# Altium PCB Test.PcbDoc (part 7 of 9)
Units mm, origin at the board's own origin, x right, y up, seen from the top; angles counter-clockwise.
Board outline 152.4 x 101.6 mm, 2 copper layers (Top Layer, Bottom Layer); 1 components, 0 nets, 1713 pads, 1 vias.
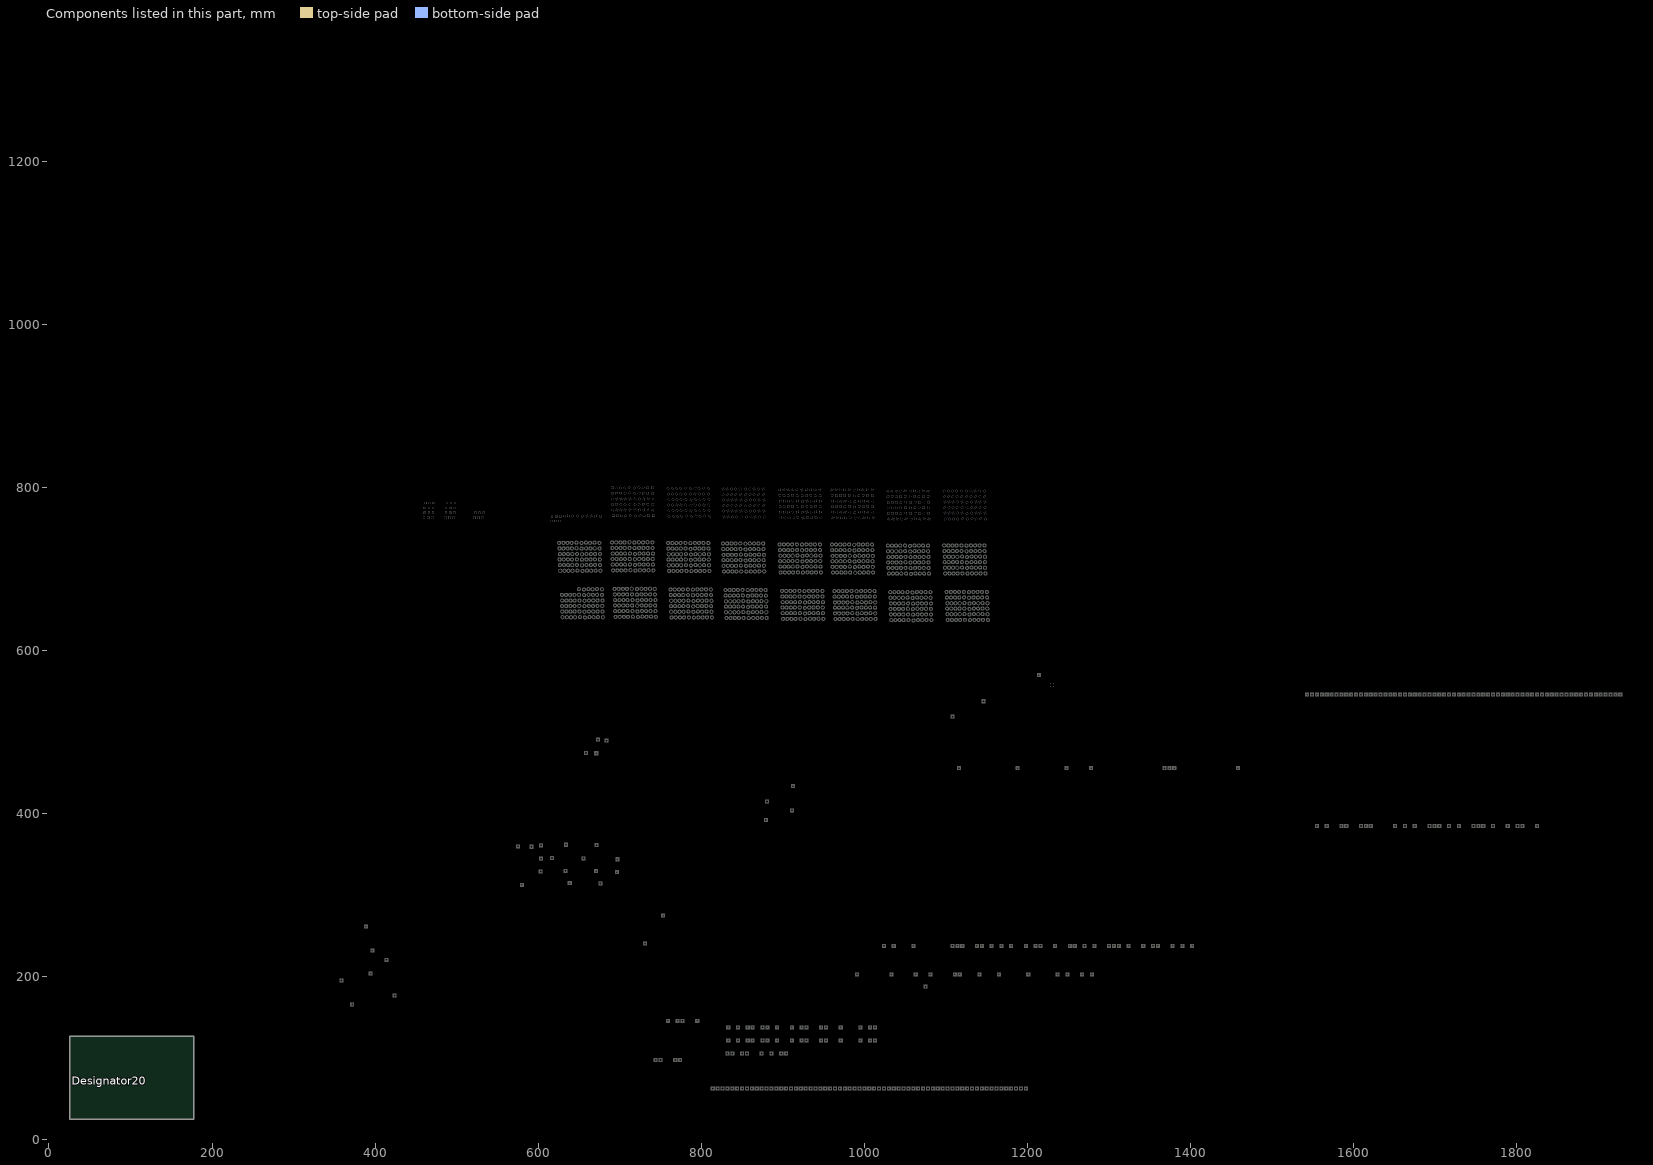
[diagram p7: the components of this part, seen from the top]

## Via types
v1: diameter 0.9, hole 0.4, Top Layer to Bottom Layer, 1 vias

## Nets (pads, with @x,y where several pads share a name; then routed paths per layer and width w, separated by ;. In a path a pad name is that pad's centre, name@x,y a point inside that pad or via, vN(x,y) a via of type N, cw(c..) or ccw(c..) an arc to the next point about the centre after c; other vN are vias at no path point) (continued)
copper on no net: (continued)
  Top Layer w0.25: 1087.002,1184.065 ccw(c1087.238,1182.817) 1087.473,1181.57 1088.908,1181.841 ccw(c1088.672,1183.089) 1088.437,1184.336 1088.967,1184.065 ; 1087.002,1197.527 ccw(c1087.238,1196.279) 1087.473,1195.032 1088.908,1195.303 ccw(c1088.672,1196.551) 1088.437,1197.798 1088.967,1197.527 ; 1087.51,1177.08 ccw(c1087.746,1175.832) 1087.981,1174.585 1089.416,1174.856 ccw(c1089.18,1176.104) 1088.945,1177.351 1089.475,1177.08 ; 1087.789,1335.27 1088.261,1332.774 1090.757,1333.246 1090.285,1335.742 ; 1088.043,1328.412 1088.515,1325.916 1091.011,1326.388 1090.539,1328.884 ; 1088.297,1314.823 1088.769,1312.327 1091.265,1312.799 1090.793,1315.295 ; 1088.32,1268.37 ccw(c1088.556,1267.122) 1088.791,1265.875 1090.226,1266.146 ccw(c1089.99,1267.394) 1089.755,1268.641 1090.285,1268.37 ; 1088.551,1307.965 1089.023,1305.469 1091.519,1305.941 1091.047,1308.437 ; 1088.551,1321.427 1089.023,1318.931 1091.519,1319.403 1091.047,1321.899 ; 1088.574,1261.512 ccw(c1088.81,1260.264) 1089.045,1259.017 1090.48,1259.288 ccw(c1090.244,1260.536) 1090.009,1261.783 1090.539,1261.512 ; 1088.828,1247.923 ccw(c1089.064,1246.675) 1089.299,1245.428 1090.734,1245.699 ccw(c1090.498,1246.947) 1090.263,1248.194 1090.793,1247.923 ; 1089.059,1300.98 1089.531,1298.484 1092.027,1298.956 1091.555,1301.452 ; 1089.082,1241.065 ccw(c1089.318,1239.817) 1089.553,1238.57 1090.988,1238.841 ccw(c1090.752,1240.089) 1090.517,1241.336 1091.047,1241.065 ; 1089.082,1254.527 ccw(c1089.318,1253.279) 1089.553,1252.032 1090.988,1252.303 ccw(c1090.752,1253.551) 1090.517,1254.798 1091.047,1254.527 ; 1089.273,1334.022 1089.273,1334.494 ; 1089.527,1327.164 1089.527,1327.636 ; 1089.59,1234.08 ccw(c1089.826,1232.832) 1090.061,1231.585 1091.496,1231.856 ccw(c1091.26,1233.104) 1091.025,1234.351 1091.555,1234.08 ; 1089.781,1313.575 1089.781,1314.047 ; 1090.035,1306.717 1090.035,1307.189 ; 1090.035,1320.179 1090.035,1320.651 ; 1090.543,1299.732 1090.543,1300.204 ; 1091.32,1211.37 ccw(c1091.556,1210.122) 1091.791,1208.875 1093.226,1209.146 ccw(c1092.99,1210.394) 1092.755,1211.641 1093.285,1211.37 ; 1091.574,1204.512 ccw(c1091.81,1203.264) 1092.045,1202.017 1093.48,1202.288 ccw(c1093.244,1203.536) 1093.009,1204.783 1093.539,1204.512 ; 1091.828,1190.923 ccw(c1092.064,1189.675) 1092.299,1188.428 1093.734,1188.699 ccw(c1093.498,1189.947) 1093.263,1191.194 1093.793,1190.923 ; 1092.082,1184.065 ccw(c1092.318,1182.817) 1092.553,1181.57 1093.988,1181.841 ccw(c1093.752,1183.089) 1093.517,1184.336 1094.047,1184.065 ; 1092.082,1197.527 ccw(c1092.318,1196.279) 1092.553,1195.032 1093.988,1195.303 ccw(c1093.752,1196.551) 1093.517,1197.798 1094.047,1197.527 ; 1092.59,1177.08 ccw(c1092.826,1175.832) 1093.061,1174.585 1094.496,1174.856 ccw(c1094.26,1176.104) 1094.025,1177.351 1094.555,1177.08 ; 1092.869,1335.27 1093.341,1332.774 1095.837,1333.246 1095.365,1335.742 ; 1093.123,1328.412 1093.595,1325.916 1096.091,1326.388 1095.619,1328.884 ; 1093.377,1314.823 1093.849,1312.327 1096.345,1312.799 1095.873,1315.295 ; 1093.4,1268.37 ccw(c1093.636,1267.122) 1093.871,1265.875 1095.306,1266.146 ccw(c1095.07,1267.394) 1094.835,1268.641 1095.365,1268.37 ; 1093.631,1307.965 1094.103,1305.469 1096.599,1305.941 1096.127,1308.437 ; 1093.631,1321.427 1094.103,1318.931 1096.599,1319.403 1096.127,1321.899 ; 1093.654,1261.512 ccw(c1093.89,1260.264) 1094.125,1259.017 1095.56,1259.288 ccw(c1095.324,1260.536) 1095.089,1261.783 1095.619,1261.512 ; 1093.908,1247.923 ccw(c1094.144,1246.675) 1094.379,1245.428 1095.814,1245.699 ccw(c1095.578,1246.947) 1095.343,1248.194 1095.873,1247.923 ; 1094.139,1300.98 1094.611,1298.484 1097.107,1298.956 1096.635,1301.452 ; 1094.162,1241.065 ccw(c1094.398,1239.817) 1094.633,1238.57 1096.068,1238.841 ccw(c1095.832,1240.089) 1095.597,1241.336 1096.127,1241.065 ; 1094.162,1254.527 ccw(c1094.398,1253.279) 1094.633,1252.032 1096.068,1252.303 ccw(c1095.832,1253.551) 1095.597,1254.798 1096.127,1254.527 ; 1094.353,1334.022 1094.353,1334.494 ; 1094.5,526 ccw(c1094.5,525) 1094.5,524 1097.5,524 ccw(c1097.5,525) 1097.5,526 ; 1094.5,526.5 1097.5,526.5 ; 1094.607,1327.164 1094.607,1327.636 ; 1094.67,1234.08 ccw(c1094.906,1232.832) 1095.141,1231.585 1096.576,1231.856 ccw(c1096.34,1233.104) 1096.105,1234.351 1096.635,1234.08 ; 1094.861,1313.575 1094.861,1314.047 ; 1095.115,1306.717 1095.115,1307.189 ; 1095.115,1320.179 1095.115,1320.651 ; 1095.623,1299.732 1095.623,1300.204 ; 1096.4,1211.37 ccw(c1096.636,1210.122) 1096.871,1208.875 1098.306,1209.146 ccw(c1098.07,1210.394) 1097.835,1211.641 1098.365,1211.37 ; 1096.654,1204.512 ccw(c1096.89,1203.264) 1097.125,1202.017 1098.56,1202.288 ccw(c1098.324,1203.536) 1098.089,1204.783 1098.619,1204.512 ; 1096.908,1190.923 ccw(c1097.144,1189.675) 1097.379,1188.428 1098.814,1188.699 ccw(c1098.578,1189.947) 1098.343,1191.194 1098.873,1190.923 ; 1097.162,1184.065 ccw(c1097.398,1182.817) 1097.633,1181.57 1099.068,1181.841 ccw(c1098.832,1183.089) 1098.597,1184.336 1099.127,1184.065 ; 1097.162,1197.527 ccw(c1097.398,1196.279) 1097.633,1195.032 1099.068,1195.303 ccw(c1098.832,1196.551) 1098.597,1197.798 1099.127,1197.527 ; 1097.67,1177.08 ccw(c1097.906,1175.832) 1098.141,1174.585 1099.576,1174.856 ccw(c1099.34,1176.104) 1099.105,1177.351 1099.635,1177.08 ; 1098.711,1335.397 1099.183,1332.901 1101.679,1333.373 1101.207,1335.869 ; 1098.965,1328.539 1099.437,1326.043 1101.933,1326.515 1101.461,1329.011 ; 1099.219,1314.95 1099.691,1312.454 1102.187,1312.926 1101.715,1315.422 ; 1099.242,1268.497 ccw(c1099.478,1267.249) 1099.713,1266.002 1101.148,1266.273 ccw(c1100.912,1267.521) 1100.677,1268.768 1101.207,1268.497 ; 1099.473,1308.092 1099.945,1305.596 1102.441,1306.068 1101.969,1308.564 ; 1099.473,1321.554 1099.945,1319.058 1102.441,1319.53 1101.969,1322.026 ; 1099.496,1261.639 ccw(c1099.732,1260.391) 1099.967,1259.144 1101.402,1259.415 ccw(c1101.166,1260.663) 1100.931,1261.91 1101.461,1261.639 ; 1099.75,1248.05 ccw(c1099.986,1246.802) 1100.221,1245.555 1101.656,1245.826 ccw(c1101.42,1247.074) 1101.185,1248.321 1101.715,1248.05 ; 1099.981,1301.107 1100.453,1298.611 1102.949,1299.083 1102.477,1301.579 ; 1100.004,1241.192 ccw(c1100.24,1239.944) 1100.475,1238.697 1101.91,1238.968 ccw(c1101.674,1240.216) 1101.439,1241.463 1101.969,1241.192 ; 1100.004,1254.654 ccw(c1100.24,1253.406) 1100.475,1252.159 1101.91,1252.43 ccw(c1101.674,1253.678) 1101.439,1254.925 1101.969,1254.654 ; 1100.195,1334.149 1100.195,1334.621 ; 1100.449,1327.291 1100.449,1327.763 ; 1100.512,1234.207 ccw(c1100.748,1232.959) 1100.983,1231.712 1102.418,1231.983 ccw(c1102.182,1233.231) 1101.947,1234.478 1102.477,1234.207 ; 1100.703,1313.702 1100.703,1314.174 ; 1100.957,1306.844 1100.957,1307.316 ; 1100.957,1320.306 1100.957,1320.778 ; 1101.465,1299.859 1101.465,1300.331 ; 1102.242,1211.497 ccw(c1102.478,1210.249) 1102.713,1209.002 1104.148,1209.273 ccw(c1103.912,1210.521) 1103.677,1211.768 1104.207,1211.497 ; 1102.496,1204.639 ccw(c1102.732,1203.391) 1102.967,1202.144 1104.402,1202.415 ccw(c1104.166,1203.663) 1103.931,1204.91 1104.461,1204.639 ; 1102.75,1191.05 ccw(c1102.986,1189.802) 1103.221,1188.555 1104.656,1188.826 ccw(c1104.42,1190.074) 1104.185,1191.321 1104.715,1191.05 ; 1103.004,1184.192 ccw(c1103.24,1182.944) 1103.475,1181.697 1104.91,1181.968 ccw(c1104.674,1183.216) 1104.439,1184.463 1104.969,1184.192 ; 1103.004,1197.654 ccw(c1103.24,1196.406) 1103.475,1195.159 1104.91,1195.43 ccw(c1104.674,1196.678) 1104.439,1197.925 1104.969,1197.654 ; 1103.512,1177.207 ccw(c1103.748,1175.959) 1103.983,1174.712 1105.418,1174.983 ccw(c1105.182,1176.231) 1104.947,1177.478 1105.477,1177.207 ; 1104.934,1335.016 1105.406,1332.52 1107.902,1332.992 1107.43,1335.488 ; 1105.188,1328.158 1105.66,1325.662 1108.156,1326.134 1107.684,1328.63 ; 1105.442,1314.569 1105.914,1312.073 1108.41,1312.545 1107.938,1315.041 ; 1105.465,1268.116 ccw(c1105.701,1266.868) 1105.936,1265.621 1107.371,1265.892 ccw(c1107.135,1267.14) 1106.9,1268.387 1107.43,1268.116 ; 1105.696,1307.711 1106.168,1305.215 1108.664,1305.687 1108.192,1308.183 ; 1105.696,1321.173 1106.168,1318.677 1108.664,1319.149 1108.192,1321.645 ; 1105.719,1261.258 ccw(c1105.955,1260.01) 1106.19,1258.763 1107.625,1259.034 ccw(c1107.389,1260.282) 1107.154,1261.529 1107.684,1261.258 ; 1105.973,1247.669 ccw(c1106.209,1246.421) 1106.444,1245.174 1107.879,1245.445 ccw(c1107.643,1246.693) 1107.408,1247.94 1107.938,1247.669 ; 1106.204,1300.726 1106.676,1298.23 1109.172,1298.702 1108.7,1301.198 ; 1106.227,1240.811 ccw(c1106.463,1239.563) 1106.698,1238.316 1108.133,1238.587 ccw(c1107.897,1239.835) 1107.662,1241.082 1108.192,1240.811 ; 1106.227,1254.273 ccw(c1106.463,1253.025) 1106.698,1251.778 1108.133,1252.049 ccw(c1107.897,1253.297) 1107.662,1254.544 1108.192,1254.273 ; 1106.418,1333.768 1106.418,1334.24 ; 1106.672,1326.91 1106.672,1327.382 ; 1106.735,1233.826 ccw(c1106.971,1232.578) 1107.206,1231.331 1108.641,1231.602 ccw(c1108.405,1232.85) 1108.17,1234.097 1108.7,1233.826 ; 1106.926,1313.321 1106.926,1313.793 ; 1107.18,1306.463 1107.18,1306.935 ; 1107.18,1319.925 1107.18,1320.397 ; 1107.688,1299.478 1107.688,1299.95 ; 1108.465,1211.116 ccw(c1108.701,1209.868) 1108.936,1208.621 1110.371,1208.892 ccw(c1110.135,1210.14) 1109.9,1211.387 1110.43,1211.116 ; 1108.719,1204.258 ccw(c1108.955,1203.01) 1109.19,1201.763 1110.625,1202.034 ccw(c1110.389,1203.282) 1110.154,1204.529 1110.684,1204.258 ; 1108.973,1190.669 ccw(c1109.209,1189.421) 1109.444,1188.174 1110.879,1188.445 ccw(c1110.643,1189.693) 1110.408,1190.94 1110.938,1190.669 ; 1109.227,1183.811 ccw(c1109.463,1182.563) 1109.698,1181.316 1111.133,1181.587 ccw(c1110.897,1182.835) 1110.662,1184.082 1111.192,1183.811 ; 1109.227,1197.273 ccw(c1109.463,1196.025) 1109.698,1194.778 1111.133,1195.049 ccw(c1110.897,1196.297) 1110.662,1197.544 1111.192,1197.273 ; 1109.735,1176.826 ccw(c1109.971,1175.578) 1110.206,1174.331 1111.641,1174.602 ccw(c1111.405,1175.85) 1111.17,1177.097 1111.7,1176.826 ; 1110.395,1335.397 1110.867,1332.901 1113.363,1333.373 1112.891,1335.869 ; 1110.649,1328.539 1111.121,1326.043 1113.617,1326.515 1113.145,1329.011 ; 1110.903,1314.95 1111.375,1312.454 1113.871,1312.926 1113.399,1315.422 ; 1110.926,1268.497 ccw(c1111.162,1267.249) 1111.397,1266.002 1112.832,1266.273 ccw(c1112.596,1267.521) 1112.361,1268.768 1112.891,1268.497 ; 1111.157,1308.092 1111.629,1305.596 1114.125,1306.068 1113.653,1308.564 ; 1111.157,1321.554 1111.629,1319.058 1114.125,1319.53 1113.653,1322.026 ; 1111.18,1261.639 ccw(c1111.416,1260.391) 1111.651,1259.144 1113.086,1259.415 ccw(c1112.85,1260.663) 1112.615,1261.91 1113.145,1261.639 ; 1111.434,1248.05 ccw(c1111.67,1246.802) 1111.905,1245.555 1113.34,1245.826 ccw(c1113.104,1247.074) 1112.869,1248.321 1113.399,1248.05 ; 1111.665,1301.107 1112.137,1298.611 1114.633,1299.083 1114.161,1301.579 ; 1111.688,1241.192 ccw(c1111.924,1239.944) 1112.159,1238.697 1113.594,1238.968 ccw(c1113.358,1240.216) 1113.123,1241.463 1113.653,1241.192 ; 1111.688,1254.654 ccw(c1111.924,1253.406) 1112.159,1252.159 1113.594,1252.43 ccw(c1113.358,1253.678) 1113.123,1254.925 1113.653,1254.654 ; 1111.879,1334.149 1111.879,1334.621 ; 1112.133,1327.291 1112.133,1327.763 ; 1112.196,1234.207 ccw(c1112.432,1232.959) 1112.667,1231.712 1114.102,1231.983 ccw(c1113.866,1233.231) 1113.631,1234.478 1114.161,1234.207 ; 1112.387,1313.702 1112.387,1314.174 ; 1112.641,1306.844 1112.641,1307.316 ; 1112.641,1320.306 1112.641,1320.778 ; 1113.149,1299.859 1113.149,1300.331 ; 1113.926,1211.497 ccw(c1114.162,1210.249) 1114.397,1209.002 1115.832,1209.273 ccw(c1115.596,1210.521) 1115.361,1211.768 1115.891,1211.497 ; 1114.18,1204.639 ccw(c1114.416,1203.391) 1114.651,1202.144 1116.086,1202.415 ccw(c1115.85,1203.663) 1115.615,1204.91 1116.145,1204.639 ; 1114.434,1191.05 ccw(c1114.67,1189.802) 1114.905,1188.555 1116.34,1188.826 ccw(c1116.104,1190.074) 1115.869,1191.321 1116.399,1191.05 ; 1114.688,1184.192 ccw(c1114.924,1182.944) 1115.159,1181.697 1116.594,1181.968 ccw(c1116.358,1183.216) 1116.123,1184.463 1116.653,1184.192 ; 1114.688,1197.654 ccw(c1114.924,1196.406) 1115.159,1195.159 1116.594,1195.43 ccw(c1116.358,1196.678) 1116.123,1197.925 1116.653,1197.654 ; 1115.196,1177.207 ccw(c1115.432,1175.959) 1115.667,1174.712 1117.102,1174.983 ccw(c1116.866,1176.231) 1116.631,1177.478 1117.161,1177.207 ; 1115.602,1335.27 1116.074,1332.774 1118.57,1333.246 1118.098,1335.742 ; 1115.856,1328.412 1116.328,1325.916 1118.824,1326.388 1118.352,1328.884 ; 1116.11,1314.823 1116.582,1312.327 1119.078,1312.799 1118.606,1315.295 ; 1116.133,1268.37 ccw(c1116.369,1267.122) 1116.604,1265.875 1118.039,1266.146 ccw(c1117.803,1267.394) 1117.568,1268.641 1118.098,1268.37 ; 1116.364,1307.965 1116.836,1305.469 1119.332,1305.941 1118.86,1308.437 ; 1116.364,1321.427 1116.836,1318.931 1119.332,1319.403 1118.86,1321.899 ; 1116.387,1261.512 ccw(c1116.623,1260.264) 1116.858,1259.017 1118.293,1259.288 ccw(c1118.057,1260.536) 1117.822,1261.783 1118.352,1261.512 ; 1116.641,1247.923 ccw(c1116.877,1246.675) 1117.112,1245.428 1118.547,1245.699 ccw(c1118.311,1246.947) 1118.076,1248.194 1118.606,1247.923 ; 1116.872,1300.98 1117.344,1298.484 1119.84,1298.956 1119.368,1301.452 ; 1116.895,1241.065 ccw(c1117.131,1239.817) 1117.366,1238.57 1118.801,1238.841 ccw(c1118.565,1240.089) 1118.33,1241.336 1118.86,1241.065 ; 1116.895,1254.527 ccw(c1117.131,1253.279) 1117.366,1252.032 1118.801,1252.303 ccw(c1118.565,1253.551) 1118.33,1254.798 1118.86,1254.527 ; 1117.086,1334.022 1117.086,1334.494 ; 1117.34,1327.164 1117.34,1327.636 ; 1117.403,1234.08 ccw(c1117.639,1232.832) 1117.874,1231.585 1119.309,1231.856 ccw(c1119.073,1233.104) 1118.838,1234.351 1119.368,1234.08 ; 1117.594,1313.575 1117.594,1314.047 ; 1117.848,1306.717 1117.848,1307.189 ; 1117.848,1320.179 1117.848,1320.651 ; 1118.356,1299.732 1118.356,1300.204 ; 1119.133,1211.37 ccw(c1119.369,1210.122) 1119.604,1208.875 1121.039,1209.146 ccw(c1120.803,1210.394) 1120.568,1211.641 1121.098,1211.37 ; 1119.387,1204.512 ccw(c1119.623,1203.264) 1119.858,1202.017 1121.293,1202.288 ccw(c1121.057,1203.536) 1120.822,1204.783 1121.352,1204.512 ; 1119.641,1190.923 ccw(c1119.877,1189.675) 1120.112,1188.428 1121.547,1188.699 ccw(c1121.311,1189.947) 1121.076,1191.194 1121.606,1190.923 ; 1119.895,1184.065 ccw(c1120.131,1182.817) 1120.366,1181.57 1121.801,1181.841 ccw(c1121.565,1183.089) 1121.33,1184.336 1121.86,1184.065 ; 1119.895,1197.527 ccw(c1120.131,1196.279) 1120.366,1195.032 1121.801,1195.303 ccw(c1121.565,1196.551) 1121.33,1197.798 1121.86,1197.527 ; 1120.403,1177.08 ccw(c1120.639,1175.832) 1120.874,1174.585 1122.309,1174.856 ccw(c1122.073,1176.104) 1121.838,1177.351 1122.368,1177.08 ; 1120.936,1335.397 1121.408,1332.901 1123.904,1333.373 1123.432,1335.869 ; 1121.19,1328.539 1121.662,1326.043 1124.158,1326.515 1123.686,1329.011 ; 1121.444,1314.95 1121.916,1312.454 1124.412,1312.926 1123.94,1315.422 ; 1121.467,1268.497 ccw(c1121.703,1267.249) 1121.938,1266.002 1123.373,1266.273 ccw(c1123.137,1267.521) 1122.902,1268.768 1123.432,1268.497 ; 1121.698,1308.092 1122.17,1305.596 1124.666,1306.068 1124.194,1308.564 ; 1121.698,1321.554 1122.17,1319.058 1124.666,1319.53 1124.194,1322.026 ; 1121.721,1261.639 ccw(c1121.957,1260.391) 1122.192,1259.144 1123.627,1259.415 ccw(c1123.391,1260.663) 1123.156,1261.91 1123.686,1261.639 ; 1121.975,1248.05 ccw(c1122.211,1246.802) 1122.446,1245.555 1123.881,1245.826 ccw(c1123.645,1247.074) 1123.41,1248.321 1123.94,1248.05 ; 1122.206,1301.107 1122.678,1298.611 1125.174,1299.083 1124.702,1301.579 ; 1122.229,1241.192 ccw(c1122.465,1239.944) 1122.7,1238.697 1124.135,1238.968 ccw(c1123.899,1240.216) 1123.664,1241.463 1124.194,1241.192 ; 1122.229,1254.654 ccw(c1122.465,1253.406) 1122.7,1252.159 1124.135,1252.43 ccw(c1123.899,1253.678) 1123.664,1254.925 1124.194,1254.654 ; 1122.42,1334.149 1122.42,1334.621 ; 1122.674,1327.291 1122.674,1327.763 ; 1122.737,1234.207 ccw(c1122.973,1232.959) 1123.208,1231.712 1124.643,1231.983 ccw(c1124.407,1233.231) 1124.172,1234.478 1124.702,1234.207 ; 1122.928,1313.702 1122.928,1314.174 ; 1123.182,1306.844 1123.182,1307.316 ; 1123.182,1320.306 1123.182,1320.778 ; 1123.69,1299.859 1123.69,1300.331 ; 1124.467,1211.497 ccw(c1124.703,1210.249) 1124.938,1209.002 1126.373,1209.273 ccw(c1126.137,1210.521) 1125.902,1211.768 1126.432,1211.497 ; 1124.721,1204.639 ccw(c1124.957,1203.391) 1125.192,1202.144 1126.627,1202.415 ccw(c1126.391,1203.663) 1126.156,1204.91 1126.686,1204.639 ; 1124.975,1191.05 ccw(c1125.211,1189.802) 1125.446,1188.555 1126.881,1188.826 ccw(c1126.645,1190.074) 1126.41,1191.321 1126.94,1191.05 ; 1125.229,1184.192 ccw(c1125.465,1182.944) 1125.7,1181.697 1127.135,1181.968 ccw(c1126.899,1183.216) 1126.664,1184.463 1127.194,1184.192 ; 1125.229,1197.654 ccw(c1125.465,1196.406) 1125.7,1195.159 1127.135,1195.43 ccw(c1126.899,1196.678) 1126.664,1197.925 1127.194,1197.654 ; 1125.737,1177.207 ccw(c1125.973,1175.959) 1126.208,1174.712 1127.643,1174.983 ccw(c1127.407,1176.231) 1127.172,1177.478 1127.702,1177.207 ; 1126.5,557 ccw(c1126.5,556) 1126.5,555 1129.5,555 ccw(c1129.5,556) 1129.5,557 ; 1126.5,557.5 1129.5,557.5 ; 1126.5,564 ccw(c1126.5,563) 1126.5,562 1129.5,562 ccw(c1129.5,563) 1129.5,564 ; 1126.5,564.5 1129.5,564.5 ; 1126.905,1335.27 1127.377,1332.774 1129.873,1333.246 1129.401,1335.742 ; 1127.159,1328.412 1127.631,1325.916 1130.127,1326.388 1129.655,1328.884 ; 1127.413,1314.823 1127.885,1312.327 1130.381,1312.799 1129.909,1315.295 ; 1127.436,1268.37 ccw(c1127.672,1267.122) 1127.907,1265.875 1129.342,1266.146 ccw(c1129.106,1267.394) 1128.871,1268.641 1129.401,1268.37 ; 1127.667,1307.965 1128.139,1305.469 1130.635,1305.941 1130.163,1308.437 ; 1127.667,1321.427 1128.139,1318.931 1130.635,1319.403 1130.163,1321.899 ; 1127.69,1261.512 ccw(c1127.926,1260.264) 1128.161,1259.017 1129.596,1259.288 ccw(c1129.36,1260.536) 1129.125,1261.783 1129.655,1261.512 ; 1127.944,1247.923 ccw(c1128.18,1246.675) 1128.415,1245.428 1129.85,1245.699 ccw(c1129.614,1246.947) 1129.379,1248.194 1129.909,1247.923 ; 1128.175,1300.98 1128.647,1298.484 1131.143,1298.956 1130.671,1301.452 ; 1128.198,1241.065 ccw(c1128.434,1239.817) 1128.669,1238.57 1130.104,1238.841 ccw(c1129.868,1240.089) 1129.633,1241.336 1130.163,1241.065 ; 1128.198,1254.527 ccw(c1128.434,1253.279) 1128.669,1252.032 1130.104,1252.303 ccw(c1129.868,1253.551) 1129.633,1254.798 1130.163,1254.527 ; 1128.389,1334.022 1128.389,1334.494 ; 1128.643,1327.164 1128.643,1327.636 ; 1128.706,1234.08 ccw(c1128.942,1232.832) 1129.177,1231.585 1130.612,1231.856 ccw(c1130.376,1233.104) 1130.141,1234.351 1130.671,1234.08 ; 1128.897,1313.575 1128.897,1314.047 ; 1129.151,1306.717 1129.151,1307.189 ; 1129.151,1320.179 1129.151,1320.651 ; 1129.659,1299.732 1129.659,1300.204 ; 1130.436,1211.37 ccw(c1130.672,1210.122) 1130.907,1208.875 1132.342,1209.146 ccw(c1132.106,1210.394) 1131.871,1211.641 1132.401,1211.37 ; 1130.69,1204.512 ccw(c1130.926,1203.264) 1131.161,1202.017 1132.596,1202.288 ccw(c1132.36,1203.536) 1132.125,1204.783 1132.655,1204.512 ; 1130.944,1190.923 ccw(c1131.18,1189.675) 1131.415,1188.428 1132.85,1188.699 ccw(c1132.614,1189.947) 1132.379,1191.194 1132.909,1190.923 ; 1131.198,1184.065 ccw(c1131.434,1182.817) 1131.669,1181.57 1133.104,1181.841 ccw(c1132.868,1183.089) 1132.633,1184.336 1133.163,1184.065 ; 1131.198,1197.527 ccw(c1131.434,1196.279) 1131.669,1195.032 1133.104,1195.303 ccw(c1132.868,1196.551) 1132.633,1197.798 1133.163,1197.527 ; 1131.706,1177.08 ccw(c1131.942,1175.832) 1132.177,1174.585 1133.612,1174.856 ccw(c1133.376,1176.104) 1133.141,1177.351 1133.671,1177.08 ; 1142.236,1335.615 1141.764,1333.119 1144.26,1332.647 1144.732,1335.143 ; 1142.49,1328.757 1142.018,1326.261 1144.514,1325.789 1144.986,1328.285 ; 1142.744,1315.168 1142.272,1312.672 1144.768,1312.2 1145.24,1314.696 ; 1142.766,1268.514 ccw(c1142.531,1267.267) 1142.295,1266.019 1143.729,1265.748 ccw(c1143.965,1266.995) 1144.201,1268.243 1144.732,1268.514 ; 1142.998,1308.31 1142.526,1305.814 1145.022,1305.342 1145.494,1307.838 ; 1142.998,1321.772 1142.526,1319.276 1145.022,1318.804 1145.494,1321.3 ; 1143.02,1261.656 ccw(c1142.785,1260.409) 1142.549,1259.161 1143.983,1258.89 ccw(c1144.219,1260.137) 1144.455,1261.385 1144.986,1261.656 ; 1143.248,1333.895 1143.248,1334.367 ; 1143.274,1248.067 ccw(c1143.039,1246.82) 1142.803,1245.572 1144.237,1245.301 ccw(c1144.473,1246.548) 1144.709,1247.796 1145.24,1248.067 ; 1143.502,1327.037 1143.502,1327.509 ; 1143.506,1301.325 1143.034,1298.829 1145.53,1298.357 1146.002,1300.853 ; 1143.528,1241.209 ccw(c1143.293,1239.962) 1143.057,1238.714 1144.491,1238.443 ccw(c1144.727,1239.69) 1144.963,1240.938 1145.494,1241.209 ; 1143.528,1254.671 ccw(c1143.293,1253.424) 1143.057,1252.176 1144.491,1251.905 ccw(c1144.727,1253.152) 1144.963,1254.4 1145.494,1254.671 ; 1143.756,1313.448 1143.756,1313.92 ; 1144.01,1306.59 1144.01,1307.062 ; 1144.01,1320.052 1144.01,1320.524 ; 1144.036,1234.224 ccw(c1143.801,1232.977) 1143.565,1231.729 1144.999,1231.458 ccw(c1145.235,1232.705) 1145.471,1233.953 1146.002,1234.224 ; 1144.518,1299.605 1144.518,1300.077 ; 1145.766,1211.514 ccw(c1145.531,1210.267) 1145.295,1209.019 1146.729,1208.748 ccw(c1146.965,1209.995) 1147.201,1211.243 1147.732,1211.514 ; 1146.02,1204.656 ccw(c1145.785,1203.409) 1145.549,1202.161 1146.983,1201.89 ccw(c1147.219,1203.137) 1147.455,1204.385 1147.986,1204.656 ; 1146.274,1191.067 ccw(c1146.039,1189.82) 1145.803,1188.572 1147.237,1188.301 ccw(c1147.473,1189.548) 1147.709,1190.796 1148.24,1191.067 ; 1146.528,1184.209 ccw(c1146.293,1182.962) 1146.057,1181.714 1147.491,1181.443 ccw(c1147.727,1182.69) 1147.963,1183.938 1148.494,1184.209 ; 1146.528,1197.671 ccw(c1146.293,1196.424) 1146.057,1195.176 1147.491,1194.905 ccw(c1147.727,1196.152) 1147.963,1197.4 1148.494,1197.671 ; 1147.036,1177.224 ccw(c1146.801,1175.977) 1146.565,1174.729 1147.999,1174.458 ccw(c1148.235,1175.705) 1148.471,1176.953 1149.002,1177.224 ; 1147.316,1335.615 1146.844,1333.119 1149.34,1332.647 1149.812,1335.143 ; 1147.57,1328.757 1147.098,1326.261 1149.594,1325.789 1150.066,1328.285 ; 1147.824,1315.168 1147.352,1312.672 1149.848,1312.2 1150.32,1314.696 ; 1147.846,1268.514 ccw(c1147.611,1267.267) 1147.375,1266.019 1148.809,1265.748 ccw(c1149.045,1266.995) 1149.281,1268.243 1149.812,1268.514 ; 1148.078,1308.31 1147.606,1305.814 1150.102,1305.342 1150.574,1307.838 ; 1148.078,1321.772 1147.606,1319.276 1150.102,1318.804 1150.574,1321.3 ; 1148.1,1261.656 ccw(c1147.865,1260.409) 1147.629,1259.161 1149.063,1258.89 ccw(c1149.299,1260.137) 1149.535,1261.385 1150.066,1261.656 ; 1148.328,1333.895 1148.328,1334.367 ; 1148.354,1248.067 ccw(c1148.119,1246.82) 1147.883,1245.572 1149.317,1245.301 ccw(c1149.553,1246.548) 1149.789,1247.796 1150.32,1248.067 ; 1148.582,1327.037 1148.582,1327.509 ; 1148.586,1301.325 1148.114,1298.829 1150.61,1298.357 1151.082,1300.853 ; 1148.608,1241.209 ccw(c1148.373,1239.962) 1148.137,1238.714 1149.571,1238.443 ccw(c1149.807,1239.69) 1150.043,1240.938 1150.574,1241.209 ; 1148.608,1254.671 ccw(c1148.373,1253.424) 1148.137,1252.176 1149.571,1251.905 ccw(c1149.807,1253.152) 1150.043,1254.4 1150.574,1254.671 ; 1148.836,1313.448 1148.836,1313.92 ; 1149.09,1306.59 1149.09,1307.062 ; 1149.09,1320.052 1149.09,1320.524 ; 1149.116,1234.224 ccw(c1148.881,1232.977) 1148.645,1231.729 1150.079,1231.458 ccw(c1150.315,1232.705) 1150.551,1233.953 1151.082,1234.224 ; 1149.598,1299.605 1149.598,1300.077 ; 1150.846,1211.514 ccw(c1150.611,1210.267) 1150.375,1209.019 1151.809,1208.748 ccw(c1152.045,1209.995) 1152.281,1211.243 1152.812,1211.514 ; 1151.1,1204.656 ccw(c1150.865,1203.409) 1150.629,1202.161 1152.063,1201.89 ccw(c1152.299,1203.137) 1152.535,1204.385 1153.066,1204.656 ; 1151.354,1191.067 ccw(c1151.119,1189.82) 1150.883,1188.572 1152.317,1188.301 ccw(c1152.553,1189.548) 1152.789,1190.796 1153.32,1191.067 ; 1151.608,1184.209 ccw(c1151.373,1182.962) 1151.137,1181.714 1152.571,1181.443 ccw(c1152.807,1182.69) 1153.043,1183.938 1153.574,1184.209 ; 1151.608,1197.671 ccw(c1151.373,1196.424) 1151.137,1195.176 1152.571,1194.905 ccw(c1152.807,1196.152) 1153.043,1197.4 1153.574,1197.671 ; 1152.116,1177.224 ccw(c1151.881,1175.977) 1151.645,1174.729 1153.079,1174.458 ccw(c1153.315,1175.705) 1153.551,1176.953 1154.082,1177.224 ; 1152.396,1335.615 1151.924,1333.119 1154.42,1332.647 1154.892,1335.143 ; 1152.65,1328.757 1152.178,1326.261 1154.674,1325.789 1155.146,1328.285 ; 1152.904,1315.168 1152.432,1312.672 1154.928,1312.2 1155.4,1314.696 ; 1152.926,1268.514 ccw(c1152.691,1267.267) 1152.455,1266.019 1153.889,1265.748 ccw(c1154.125,1266.995) 1154.361,1268.243 1154.892,1268.514 ; 1153.158,1308.31 1152.686,1305.814 1155.182,1305.342 1155.654,1307.838 ; 1153.158,1321.772 1152.686,1319.276 1155.182,1318.804 1155.654,1321.3 ; 1153.18,1261.656 ccw(c1152.945,1260.409) 1152.709,1259.161 1154.143,1258.89 ccw(c1154.379,1260.137) 1154.615,1261.385 1155.146,1261.656 ; 1153.408,1333.895 1153.408,1334.367 ; 1153.434,1248.067 ccw(c1153.199,1246.82) 1152.963,1245.572 1154.397,1245.301 ccw(c1154.633,1246.548) 1154.869,1247.796 1155.4,1248.067 ; 1153.662,1327.037 1153.662,1327.509 ; 1153.666,1301.325 1153.194,1298.829 1155.69,1298.357 1156.162,1300.853 ; 1153.688,1241.209 ccw(c1153.453,1239.962) 1153.217,1238.714 1154.651,1238.443 ccw(c1154.887,1239.69) 1155.123,1240.938 1155.654,1241.209 ; 1153.688,1254.671 ccw(c1153.453,1253.424) 1153.217,1252.176 1154.651,1251.905 ccw(c1154.887,1253.152) 1155.123,1254.4 1155.654,1254.671 ; 1153.916,1313.448 1153.916,1313.92 ; 1154.17,1306.59 1154.17,1307.062 ; 1154.17,1320.052 1154.17,1320.524 ; 1154.196,1234.224 ccw(c1153.961,1232.977) 1153.725,1231.729 1155.159,1231.458 ccw(c1155.395,1232.705) 1155.631,1233.953 1156.162,1234.224 ; 1154.678,1299.605 1154.678,1300.077 ; 1155.926,1211.514 ccw(c1155.691,1210.267) 1155.455,1209.019 1156.889,1208.748 ccw(c1157.125,1209.995) 1157.361,1211.243 1157.892,1211.514 ; 1156.18,1204.656 ccw(c1155.945,1203.409) 1155.709,1202.161 1157.143,1201.89 ccw(c1157.379,1203.137) 1157.615,1204.385 1158.146,1204.656 ; 1156.434,1191.067 ccw(c1156.199,1189.82) 1155.963,1188.572 1157.397,1188.301 ccw(c1157.633,1189.548) 1157.869,1190.796 1158.4,1191.067 ; 1156.688,1184.209 ccw(c1156.453,1182.962) 1156.217,1181.714 1157.651,1181.443 ccw(c1157.887,1182.69) 1158.123,1183.938 1158.654,1184.209 ; 1156.688,1197.671 ccw(c1156.453,1196.424) 1156.217,1195.176 1157.651,1194.905 ccw(c1157.887,1196.152) 1158.123,1197.4 1158.654,1197.671 ; 1157.196,1177.224 ccw(c1156.961,1175.977) 1156.725,1174.729 1158.159,1174.458 ccw(c1158.395,1175.705) 1158.631,1176.953 1159.162,1177.224 ; 1157.476,1335.615 1157.004,1333.119 1159.5,1332.647 1159.972,1335.143 ; 1157.73,1328.757 1157.258,1326.261 1159.754,1325.789 1160.226,1328.285 ; 1157.984,1315.168 1157.512,1312.672 1160.008,1312.2 1160.48,1314.696 ; 1158.006,1268.514 ccw(c1157.771,1267.267) 1157.535,1266.019 1158.969,1265.748 ccw(c1159.205,1266.995) 1159.441,1268.243 1159.972,1268.514 ; 1158.238,1308.31 1157.766,1305.814 1160.262,1305.342 1160.734,1307.838 ; 1158.238,1321.772 1157.766,1319.276 1160.262,1318.804 1160.734,1321.3 ; 1158.26,1261.656 ccw(c1158.025,1260.409) 1157.789,1259.161 1159.223,1258.89 ccw(c1159.459,1260.137) 1159.695,1261.385 1160.226,1261.656 ; 1158.488,1333.895 1158.488,1334.367 ; 1158.514,1248.067 ccw(c1158.279,1246.82) 1158.043,1245.572 1159.477,1245.301 ccw(c1159.713,1246.548) 1159.949,1247.796 1160.48,1248.067 ; 1158.742,1327.037 1158.742,1327.509 ; 1158.746,1301.325 1158.274,1298.829 1160.77,1298.357 1161.242,1300.853 ; 1158.768,1241.209 ccw(c1158.533,1239.962) 1158.297,1238.714 1159.731,1238.443 ccw(c1159.967,1239.69) 1160.203,1240.938 1160.734,1241.209 ; 1158.768,1254.671 ccw(c1158.533,1253.424) 1158.297,1252.176 1159.731,1251.905 ccw(c1159.967,1253.152) 1160.203,1254.4 1160.734,1254.671 ; 1158.996,1313.448 1158.996,1313.92 ; 1159.25,1306.59 1159.25,1307.062 ; 1159.25,1320.052 1159.25,1320.524 ; 1159.276,1234.224 ccw(c1159.041,1232.977) 1158.805,1231.729 1160.239,1231.458 ccw(c1160.475,1232.705) 1160.711,1233.953 1161.242,1234.224 ; 1159.758,1299.605 1159.758,1300.077 ; 1161.006,1211.514 ccw(c1160.771,1210.267) 1160.535,1209.019 1161.969,1208.748 ccw(c1162.205,1209.995) 1162.441,1211.243 1162.972,1211.514 ; 1161.26,1204.656 ccw(c1161.025,1203.409) 1160.789,1202.161 1162.223,1201.89 ccw(c1162.459,1203.137) 1162.695,1204.385 1163.226,1204.656 ; 1161.514,1191.067 ccw(c1161.279,1189.82) 1161.043,1188.572 1162.477,1188.301 ccw(c1162.713,1189.548) 1162.949,1190.796 1163.48,1191.067 ; 1161.768,1184.209 ccw(c1161.533,1182.962) 1161.297,1181.714 1162.731,1181.443 ccw(c1162.967,1182.69) 1163.203,1183.938 1163.734,1184.209 ; 1161.768,1197.671 ccw(c1161.533,1196.424) 1161.297,1195.176 1162.731,1194.905 ccw(c1162.967,1196.152) 1163.203,1197.4 1163.734,1197.671 ; 1162.276,1177.224 ccw(c1162.041,1175.977) 1161.805,1174.729 1163.239,1174.458 ccw(c1163.475,1175.705) 1163.711,1176.953 1164.242,1177.224 ; 1163.318,1335.742 1162.846,1333.246 1165.342,1332.774 1165.814,1335.27 ; 1163.572,1328.884 1163.1,1326.388 1165.596,1325.916 1166.068,1328.412 ; 1163.826,1315.295 1163.354,1312.799 1165.85,1312.327 1166.322,1314.823 ; 1163.848,1268.641 ccw(c1163.613,1267.394) 1163.377,1266.146 1164.811,1265.875 ccw(c1165.047,1267.122) 1165.283,1268.37 1165.814,1268.641 ; 1164.08,1308.437 1163.608,1305.941 1166.104,1305.469 1166.576,1307.965 ; 1164.08,1321.899 1163.608,1319.403 1166.104,1318.931 1166.576,1321.427 ; 1164.102,1261.783 ccw(c1163.867,1260.536) 1163.631,1259.288 1165.065,1259.017 ccw(c1165.301,1260.264) 1165.537,1261.512 1166.068,1261.783 ; 1164.33,1334.022 1164.33,1334.494 ; 1164.356,1248.194 ccw(c1164.121,1246.947) 1163.885,1245.699 1165.319,1245.428 ccw(c1165.555,1246.675) 1165.791,1247.923 1166.322,1248.194 ; 1164.584,1327.164 1164.584,1327.636 ; 1164.588,1301.452 1164.116,1298.956 1166.612,1298.484 1167.084,1300.98 ; 1164.61,1241.336 ccw(c1164.375,1240.089) 1164.139,1238.841 1165.573,1238.57 ccw(c1165.809,1239.817) 1166.045,1241.065 1166.576,1241.336 ; 1164.61,1254.798 ccw(c1164.375,1253.551) 1164.139,1252.303 1165.573,1252.032 ccw(c1165.809,1253.279) 1166.045,1254.527 1166.576,1254.798 ; 1164.838,1313.575 1164.838,1314.047 ; 1165.092,1306.717 1165.092,1307.189 ; 1165.092,1320.179 1165.092,1320.651 ; 1165.118,1234.351 ccw(c1164.883,1233.104) 1164.647,1231.856 1166.081,1231.585 ccw(c1166.317,1232.832) 1166.553,1234.08 1167.084,1234.351 ; 1165.6,1299.732 1165.6,1300.204 ; 1166.848,1211.641 ccw(c1166.613,1210.394) 1166.377,1209.146 1167.811,1208.875 ccw(c1168.047,1210.122) 1168.283,1211.37 1168.814,1211.641 ; 1167.102,1204.783 ccw(c1166.867,1203.536) 1166.631,1202.288 1168.065,1202.017 ccw(c1168.301,1203.264) 1168.537,1204.512 1169.068,1204.783 ; 1167.356,1191.194 ccw(c1167.121,1189.947) 1166.885,1188.699 1168.319,1188.428 ccw(c1168.555,1189.675) 1168.791,1190.923 1169.322,1191.194 ; 1167.61,1184.336 ccw(c1167.375,1183.089) 1167.139,1181.841 1168.573,1181.57 ccw(c1168.809,1182.817) 1169.045,1184.065 1169.576,1184.336 ; 1167.61,1197.798 ccw(c1167.375,1196.551) 1167.139,1195.303 1168.573,1195.032 ccw(c1168.809,1196.279) 1169.045,1197.527 1169.576,1197.798 ; 1168.118,1177.351 ccw(c1167.883,1176.104) 1167.647,1174.856 1169.081,1174.585 ccw(c1169.317,1175.832) 1169.553,1177.08 1170.084,1177.351 ; 1169.541,1335.361 1169.069,1332.865 1171.565,1332.393 1172.037,1334.889 ; 1169.795,1328.503 1169.323,1326.007 1171.819,1325.535 1172.291,1328.031 ; 1170.049,1314.914 1169.577,1312.418 1172.073,1311.946 1172.545,1314.442 ; 1170.071,1268.26 ccw(c1169.836,1267.013) 1169.6,1265.765 1171.034,1265.494 ccw(c1171.27,1266.741) 1171.506,1267.989 1172.037,1268.26 ; 1170.303,1308.056 1169.831,1305.56 1172.327,1305.088 1172.799,1307.584 ; 1170.303,1321.518 1169.831,1319.022 1172.327,1318.55 1172.799,1321.046 ; 1170.325,1261.402 ccw(c1170.09,1260.155) 1169.854,1258.907 1171.288,1258.636 ccw(c1171.524,1259.883) 1171.76,1261.131 1172.291,1261.402 ; 1170.553,1333.641 1170.553,1334.113 ; 1170.579,1247.813 ccw(c1170.344,1246.566) 1170.108,1245.318 1171.542,1245.047 ccw(c1171.778,1246.294) 1172.014,1247.542 1172.545,1247.813 ; 1170.807,1326.783 1170.807,1327.255 ; 1170.811,1301.071 1170.339,1298.575 1172.835,1298.103 1173.307,1300.599 ; 1170.833,1240.955 ccw(c1170.598,1239.708) 1170.362,1238.46 1171.796,1238.189 ccw(c1172.032,1239.436) 1172.268,1240.684 1172.799,1240.955 ; 1170.833,1254.417 ccw(c1170.598,1253.17) 1170.362,1251.922 1171.796,1251.651 ccw(c1172.032,1252.898) 1172.268,1254.146 1172.799,1254.417 ; 1171.061,1313.194 1171.061,1313.666 ; 1171.315,1306.336 1171.315,1306.808 ; 1171.315,1319.798 1171.315,1320.27 ; 1171.341,1233.97 ccw(c1171.106,1232.723) 1170.87,1231.475 1172.304,1231.204 ccw(c1172.54,1232.451) 1172.776,1233.699 1173.307,1233.97 ; 1171.823,1299.351 1171.823,1299.823 ; 1173.071,1211.26 ccw(c1172.836,1210.013) 1172.6,1208.765 1174.034,1208.494 ccw(c1174.27,1209.741) 1174.506,1210.989 1175.037,1211.26 ; 1173.325,1204.402 ccw(c1173.09,1203.155) 1172.854,1201.907 1174.288,1201.636 ccw(c1174.524,1202.883) 1174.76,1204.131 1175.291,1204.402 ; 1173.579,1190.813 ccw(c1173.344,1189.566) 1173.108,1188.318 1174.542,1188.047 ccw(c1174.778,1189.294) 1175.014,1190.542 1175.545,1190.813 ; 1173.833,1183.955 ccw(c1173.598,1182.708) 1173.362,1181.46 1174.796,1181.189 ccw(c1175.032,1182.436) 1175.268,1183.684 1175.799,1183.955 ; 1173.833,1197.417 ccw(c1173.598,1196.17) 1173.362,1194.922 1174.796,1194.651 ccw(c1175.032,1195.898) 1175.268,1197.146 1175.799,1197.417 ; 1174.341,1176.97 ccw(c1174.106,1175.723) 1173.87,1174.475 1175.304,1174.204 ccw(c1175.54,1175.451) 1175.776,1176.699 1176.307,1176.97 ; 1175.002,1335.742 1174.53,1333.246 1177.026,1332.774 1177.498,1335.27 ; 1175.256,1328.884 1174.784,1326.388 1177.28,1325.916 1177.752,1328.412 ; 1175.51,1315.295 1175.038,1312.799 1177.534,1312.327 1178.006,1314.823 ; 1175.532,1268.641 ccw(c1175.297,1267.394) 1175.061,1266.146 1176.495,1265.875 ccw(c1176.731,1267.122) 1176.967,1268.37 1177.498,1268.641 ; 1175.764,1308.437 1175.292,1305.941 1177.788,1305.469 1178.26,1307.965 ; 1175.764,1321.899 1175.292,1319.403 1177.788,1318.931 1178.26,1321.427 ; 1175.786,1261.783 ccw(c1175.551,1260.536) 1175.315,1259.288 1176.749,1259.017 ccw(c1176.985,1260.264) 1177.221,1261.512 1177.752,1261.783 ; 1176.014,1334.022 1176.014,1334.494 ; 1176.04,1248.194 ccw(c1175.805,1246.947) 1175.569,1245.699 1177.003,1245.428 ccw(c1177.239,1246.675) 1177.475,1247.923 1178.006,1248.194 ; 1176.268,1327.164 1176.268,1327.636 ; 1176.272,1301.452 1175.8,1298.956 1178.296,1298.484 1178.768,1300.98 ; 1176.294,1241.336 ccw(c1176.059,1240.089) 1175.823,1238.841 1177.257,1238.57 ccw(c1177.493,1239.817) 1177.729,1241.065 1178.26,1241.336 ; 1176.294,1254.798 ccw(c1176.059,1253.551) 1175.823,1252.303 1177.257,1252.032 ccw(c1177.493,1253.279) 1177.729,1254.527 1178.26,1254.798 ; 1176.522,1313.575 1176.522,1314.047 ; 1176.776,1306.717 1176.776,1307.189 ; 1176.776,1320.179 1176.776,1320.651 ; 1176.802,1234.351 ccw(c1176.567,1233.104) 1176.331,1231.856 1177.765,1231.585 ccw(c1178.001,1232.832) 1178.237,1234.08 1178.768,1234.351 ; 1177.284,1299.732 1177.284,1300.204 ; 1178.532,1211.641 ccw(c1178.297,1210.394) 1178.061,1209.146 1179.495,1208.875 ccw(c1179.731,1210.122) 1179.967,1211.37 1180.498,1211.641 ; 1178.786,1204.783 ccw(c1178.551,1203.536) 1178.315,1202.288 1179.749,1202.017 ccw(c1179.985,1203.264) 1180.221,1204.512 1180.752,1204.783 ; 1179.04,1191.194 ccw(c1178.805,1189.947) 1178.569,1188.699 1180.003,1188.428 ccw(c1180.239,1189.675) 1180.475,1190.923 1181.006,1191.194 ; 1179.294,1184.336 ccw(c1179.059,1183.089) 1178.823,1181.841 1180.257,1181.57 ccw(c1180.493,1182.817) 1180.729,1184.065 1181.26,1184.336 ; 1179.294,1197.798 ccw(c1179.059,1196.551) 1178.823,1195.303 1180.257,1195.032 ccw(c1180.493,1196.279) 1180.729,1197.527 1181.26,1197.798 ; 1179.802,1177.351 ccw(c1179.567,1176.104) 1179.331,1174.856 1180.765,1174.585 ccw(c1181.001,1175.832) 1181.237,1177.08 1181.768,1177.351 ; 1180.209,1335.615 1179.737,1333.119 1182.233,1332.647 1182.705,1335.143 ; 1180.463,1328.757 1179.991,1326.261 1182.487,1325.789 1182.959,1328.285 ; 1180.717,1315.168 1180.245,1312.672 1182.741,1312.2 1183.213,1314.696 ; 1180.739,1268.514 ccw(c1180.504,1267.267) 1180.268,1266.019 1181.702,1265.748 ccw(c1181.938,1266.995) 1182.174,1268.243 1182.705,1268.514 ; 1180.971,1308.31 1180.499,1305.814 1182.995,1305.342 1183.467,1307.838 ; 1180.971,1321.772 1180.499,1319.276 1182.995,1318.804 1183.467,1321.3 ; 1180.993,1261.656 ccw(c1180.758,1260.409) 1180.522,1259.161 1181.956,1258.89 ccw(c1182.192,1260.137) 1182.428,1261.385 1182.959,1261.656 ; 1181.221,1333.895 1181.221,1334.367 ; 1181.247,1248.067 ccw(c1181.012,1246.82) 1180.776,1245.572 1182.21,1245.301 ccw(c1182.446,1246.548) 1182.682,1247.796 1183.213,1248.067 ; 1181.475,1327.037 1181.475,1327.509 ; 1181.479,1301.325 1181.007,1298.829 1183.503,1298.357 1183.975,1300.853 ; 1181.501,1241.209 ccw(c1181.266,1239.962) 1181.03,1238.714 1182.464,1238.443 ccw(c1182.7,1239.69) 1182.936,1240.938 1183.467,1241.209 ; 1181.501,1254.671 ccw(c1181.266,1253.424) 1181.03,1252.176 1182.464,1251.905 ccw(c1182.7,1253.152) 1182.936,1254.4 1183.467,1254.671 ; 1181.729,1313.448 1181.729,1313.92 ; 1181.983,1306.59 1181.983,1307.062 ; 1181.983,1320.052 1181.983,1320.524 ; 1182.009,1234.224 ccw(c1181.774,1232.977) 1181.538,1231.729 1182.972,1231.458 ccw(c1183.208,1232.705) 1183.444,1233.953 1183.975,1234.224 ; 1182.491,1299.605 1182.491,1300.077 ; 1183.739,1211.514 ccw(c1183.504,1210.267) 1183.268,1209.019 1184.702,1208.748 ccw(c1184.938,1209.995) 1185.174,1211.243 1185.705,1211.514 ; 1183.993,1204.656 ccw(c1183.758,1203.409) 1183.522,1202.161 1184.956,1201.89 ccw(c1185.192,1203.137) 1185.428,1204.385 1185.959,1204.656 ; 1184.247,1191.067 ccw(c1184.012,1189.82) 1183.776,1188.572 1185.21,1188.301 ccw(c1185.446,1189.548) 1185.682,1190.796 1186.213,1191.067 ; 1184.501,1184.209 ccw(c1184.266,1182.962) 1184.03,1181.714 1185.464,1181.443 ccw(c1185.7,1182.69) 1185.936,1183.938 1186.467,1184.209 ; 1184.501,1197.671 ccw(c1184.266,1196.424) 1184.03,1195.176 1185.464,1194.905 ccw(c1185.7,1196.152) 1185.936,1197.4 1186.467,1197.671 ; 1185.009,1177.224 ccw(c1184.774,1175.977) 1184.538,1174.729 1185.972,1174.458 ccw(c1186.208,1175.705) 1186.444,1176.953 1186.975,1177.224 ; 1185.543,1335.742 1185.071,1333.246 1187.567,1332.774 1188.039,1335.27 ; 1185.797,1328.884 1185.325,1326.388 1187.821,1325.916 1188.293,1328.412 ; 1186.051,1315.295 1185.579,1312.799 1188.075,1312.327 1188.547,1314.823 ; 1186.073,1268.641 ccw(c1185.838,1267.394) 1185.602,1266.146 1187.036,1265.875 ccw(c1187.272,1267.122) 1187.508,1268.37 1188.039,1268.641 ; 1186.305,1308.437 1185.833,1305.941 1188.329,1305.469 1188.801,1307.965 ; 1186.305,1321.899 1185.833,1319.403 1188.329,1318.931 1188.801,1321.427 ; 1186.327,1261.783 ccw(c1186.092,1260.536) 1185.856,1259.288 1187.29,1259.017 ccw(c1187.526,1260.264) 1187.762,1261.512 1188.293,1261.783 ; 1186.555,1334.022 1186.555,1334.494 ; 1186.581,1248.194 ccw(c1186.346,1246.947) 1186.11,1245.699 1187.544,1245.428 ccw(c1187.78,1246.675) 1188.016,1247.923 1188.547,1248.194 ; 1186.809,1327.164 1186.809,1327.636 ; 1186.813,1301.452 1186.341,1298.956 1188.837,1298.484 1189.309,1300.98 ; 1186.835,1241.336 ccw(c1186.6,1240.089) 1186.364,1238.841 1187.798,1238.57 ccw(c1188.034,1239.817) 1188.27,1241.065 1188.801,1241.336 ; 1186.835,1254.798 ccw(c1186.6,1253.551) 1186.364,1252.303 1187.798,1252.032 ccw(c1188.034,1253.279) 1188.27,1254.527 1188.801,1254.798 ; 1187.063,1313.575 1187.063,1314.047 ; 1187.317,1306.717 1187.317,1307.189 ; 1187.317,1320.179 1187.317,1320.651 ; 1187.343,1234.351 ccw(c1187.108,1233.104) 1186.872,1231.856 1188.306,1231.585 ccw(c1188.542,1232.832) 1188.778,1234.08 1189.309,1234.351 ; 1187.825,1299.732 1187.825,1300.204 ; 1189.073,1211.641 ccw(c1188.838,1210.394) 1188.602,1209.146 1190.036,1208.875 ccw(c1190.272,1210.122) 1190.508,1211.37 1191.039,1211.641 ; 1189.327,1204.783 ccw(c1189.092,1203.536) 1188.856,1202.288 1190.29,1202.017 ccw(c1190.526,1203.264) 1190.762,1204.512 1191.293,1204.783 ; 1189.581,1191.194 ccw(c1189.346,1189.947) 1189.11,1188.699 1190.544,1188.428 ccw(c1190.78,1189.675) 1191.016,1190.923 1191.547,1191.194 ; 1189.835,1184.336 ccw(c1189.6,1183.089) 1189.364,1181.841 1190.798,1181.57 ccw(c1191.034,1182.817) 1191.27,1184.065 1191.801,1184.336 ; 1189.835,1197.798 ccw(c1189.6,1196.551) 1189.364,1195.303 1190.798,1195.032 ccw(c1191.034,1196.279) 1191.27,1197.527 1191.801,1197.798 ; 1190.343,1177.351 ccw(c1190.108,1176.104) 1189.872,1174.856 1191.306,1174.585 ccw(c1191.542,1175.832) 1191.778,1177.08 1192.309,1177.351 ; 1191.512,1335.615 1191.04,1333.119 1193.536,1332.647 1194.008,1335.143 ; 1191.766,1328.757 1191.294,1326.261 1193.79,1325.789 1194.262,1328.285 ; 1192.02,1315.168 1191.548,1312.672 1194.044,1312.2 1194.516,1314.696 ; 1192.042,1268.514 ccw(c1191.807,1267.267) 1191.571,1266.019 1193.005,1265.748 ccw(c1193.241,1266.995) 1193.477,1268.243 1194.008,1268.514 ; 1192.274,1308.31 1191.802,1305.814 1194.298,1305.342 1194.77,1307.838 ; 1192.274,1321.772 1191.802,1319.276 1194.298,1318.804 1194.77,1321.3 ; 1192.296,1261.656 ccw(c1192.061,1260.409) 1191.825,1259.161 1193.259,1258.89 ccw(c1193.495,1260.137) 1193.731,1261.385 1194.262,1261.656 ; 1192.524,1333.895 1192.524,1334.367 ; 1192.55,1248.067 ccw(c1192.315,1246.82) 1192.079,1245.572 1193.513,1245.301 ccw(c1193.749,1246.548) 1193.985,1247.796 1194.516,1248.067 ; 1192.778,1327.037 1192.778,1327.509 ; 1192.782,1301.325 1192.31,1298.829 1194.806,1298.357 1195.278,1300.853 ; 1192.804,1241.209 ccw(c1192.569,1239.962) 1192.333,1238.714 1193.767,1238.443 ccw(c1194.003,1239.69) 1194.239,1240.938 1194.77,1241.209 ; 1192.804,1254.671 ccw(c1192.569,1253.424) 1192.333,1252.176 1193.767,1251.905 ccw(c1194.003,1253.152) 1194.239,1254.4 1194.77,1254.671 ; 1193.032,1313.448 1193.032,1313.92 ; 1193.286,1306.59 1193.286,1307.062 ; 1193.286,1320.052 1193.286,1320.524 ; 1193.312,1234.224 ccw(c1193.077,1232.977) 1192.841,1231.729 1194.275,1231.458 ccw(c1194.511,1232.705) 1194.747,1233.953 1195.278,1234.224 ; 1193.794,1299.605 1193.794,1300.077 ; 1195.042,1211.514 ccw(c1194.807,1210.267) 1194.571,1209.019 1196.005,1208.748 ccw(c1196.241,1209.995) 1196.477,1211.243 1197.008,1211.514 ; 1195.296,1204.656 ccw(c1195.061,1203.409) 1194.825,1202.161 1196.259,1201.89 ccw(c1196.495,1203.137) 1196.731,1204.385 1197.262,1204.656 ; 1195.55,1191.067 ccw(c1195.315,1189.82) 1195.079,1188.572 1196.513,1188.301 ccw(c1196.749,1189.548) 1196.985,1190.796 1197.516,1191.067 ; 1195.804,1184.209 ccw(c1195.569,1182.962) 1195.333,1181.714 1196.767,1181.443 ccw(c1197.003,1182.69) 1197.239,1183.938 1197.77,1184.209 ; 1195.804,1197.671 ccw(c1195.569,1196.424) 1195.333,1195.176 1196.767,1194.905 ccw(c1197.003,1196.152) 1197.239,1197.4 1197.77,1197.671 ; 1196.312,1177.224 ccw(c1196.077,1175.977) 1195.841,1174.729 1197.275,1174.458 ccw(c1197.511,1175.705) 1197.747,1176.953 1198.278,1177.224 ; 1211.701,1331.483 1211.701,1333.985 ; 1211.955,1324.625 1211.955,1327.127 ; 1212.209,1311.036 1212.209,1313.538 ; 1212.463,1304.178 1212.463,1306.68 ; 1212.463,1317.64 1212.463,1320.142 ; 1212.731,1266.232 1212.825,1264.794 cw(c1211.574,1265.015) 1210.323,1265.236 1210.577,1266.674 cw(c1211.828,1266.453) 1213.079,1266.232 ; 1212.731,1331.262 1210.229,1331.704 1210.671,1334.206 1213.173,1333.764 ; 1212.971,1297.193 1212.971,1299.695 ; 1212.985,1259.374 1213.079,1257.936 cw(c1211.828,1258.157) 1210.577,1258.378 1210.831,1259.816 cw(c1212.082,1259.595) 1213.333,1259.374 ; 1212.985,1324.404 1210.483,1324.846 1210.925,1327.348 1213.427,1326.906 ; 1213.239,1245.785 1213.333,1244.347 cw(c1212.082,1244.568) 1210.831,1244.789 1211.085,1246.227 cw(c1212.336,1246.006) 1213.587,1245.785 ; 1213.239,1310.815 1210.737,1311.257 1211.179,1313.759 1213.681,1313.317 ; 1213.493,1238.927 1213.587,1237.489 cw(c1212.336,1237.71) 1211.085,1237.931 1211.339,1239.369 cw(c1212.59,1239.148) 1213.841,1238.927 ; 1213.493,1252.389 1213.587,1250.951 cw(c1212.336,1251.172) 1211.085,1251.393 1211.339,1252.831 cw(c1212.59,1252.61) 1213.841,1252.389 ; 1213.493,1303.957 1210.991,1304.399 1211.433,1306.901 1213.935,1306.459 ; 1213.493,1317.419 1210.991,1317.861 1211.433,1320.363 1213.935,1319.921 ; 1214.001,1231.942 1214.095,1230.504 cw(c1212.844,1230.725) 1211.593,1230.946 1211.847,1232.384 cw(c1213.098,1232.163) 1214.349,1231.942 ; 1214.001,1296.972 1211.499,1297.414 1211.941,1299.916 1214.443,1299.474 ; 1215.731,1209.232 1215.825,1207.794 cw(c1214.574,1208.015) 1213.323,1208.236 1213.577,1209.674 cw(c1214.828,1209.453) 1216.079,1209.232 ; 1215.985,1202.374 1216.079,1200.936 cw(c1214.828,1201.157) 1213.577,1201.378 1213.831,1202.816 cw(c1215.082,1202.595) 1216.333,1202.374 ; 1216.239,1188.785 1216.333,1187.347 cw(c1215.082,1187.568) 1213.831,1187.789 1214.085,1189.227 cw(c1215.336,1189.006) 1216.587,1188.785 ; 1216.493,1181.927 1216.587,1180.489 cw(c1215.336,1180.71) 1214.085,1180.931 1214.339,1182.369 cw(c1215.59,1182.148) 1216.841,1181.927 ; 1216.493,1195.389 1216.587,1193.951 cw(c1215.336,1194.172) 1214.085,1194.393 1214.339,1195.831 cw(c1215.59,1195.61) 1216.841,1195.389 ; 1216.781,1331.483 1216.781,1333.985 ; 1217.001,1174.942 1217.095,1173.504 cw(c1215.844,1173.725) 1214.593,1173.946 1214.847,1175.384 cw(c1216.098,1175.163) 1217.349,1174.942 ; 1217.035,1324.625 1217.035,1327.127 ; 1217.289,1311.036 1217.289,1313.538 ; 1217.543,1304.178 1217.543,1306.68 ; 1217.543,1317.64 1217.543,1320.142 ; 1217.811,1266.232 1217.905,1264.794 cw(c1216.654,1265.015) 1215.403,1265.236 1215.657,1266.674 cw(c1216.908,1266.453) 1218.159,1266.232 ; 1217.811,1331.262 1215.309,1331.704 1215.751,1334.206 1218.253,1333.764 ; 1218.051,1297.193 1218.051,1299.695 ; 1218.065,1259.374 1218.159,1257.936 cw(c1216.908,1258.157) 1215.657,1258.378 1215.911,1259.816 cw(c1217.162,1259.595) 1218.413,1259.374 ; 1218.065,1324.404 1215.563,1324.846 1216.005,1327.348 1218.507,1326.906 ; 1218.319,1245.785 1218.413,1244.347 cw(c1217.162,1244.568) 1215.911,1244.789 1216.165,1246.227 cw(c1217.416,1246.006) 1218.667,1245.785 ; 1218.319,1310.815 1215.817,1311.257 1216.259,1313.759 1218.761,1313.317 ; 1218.573,1238.927 1218.667,1237.489 cw(c1217.416,1237.71) 1216.165,1237.931 1216.419,1239.369 cw(c1217.67,1239.148) 1218.921,1238.927 ; 1218.573,1252.389 1218.667,1250.951 cw(c1217.416,1251.172) 1216.165,1251.393 1216.419,1252.831 cw(c1217.67,1252.61) 1218.921,1252.389 ; 1218.573,1303.957 1216.071,1304.399 1216.513,1306.901 1219.015,1306.459 ; 1218.573,1317.419 1216.071,1317.861 1216.513,1320.363 1219.015,1319.921 ; 1219.081,1231.942 1219.175,1230.504 cw(c1217.924,1230.725) 1216.673,1230.946 1216.927,1232.384 cw(c1218.178,1232.163) 1219.429,1231.942 ; 1219.081,1296.972 1216.579,1297.414 1217.021,1299.916 1219.523,1299.474 ; 1220.811,1209.232 1220.905,1207.794 cw(c1219.654,1208.015) 1218.403,1208.236 1218.657,1209.674 cw(c1219.908,1209.453) 1221.159,1209.232 ; 1221.065,1202.374 1221.159,1200.936 cw(c1219.908,1201.157) 1218.657,1201.378 1218.911,1202.816 cw(c1220.162,1202.595) 1221.413,1202.374 ; 1221.319,1188.785 1221.413,1187.347 cw(c1220.162,1187.568) 1218.911,1187.789 1219.165,1189.227 cw(c1220.416,1189.006) 1221.667,1188.785 ; 1221.573,1181.927 1221.667,1180.489 cw(c1220.416,1180.71) 1219.165,1180.931 1219.419,1182.369 cw(c1220.67,1182.148) 1221.921,1181.927 ; 1221.573,1195.389 1221.667,1193.951 cw(c1220.416,1194.172) 1219.165,1194.393 1219.419,1195.831 cw(c1220.67,1195.61) 1221.921,1195.389 ; 1221.861,1331.483 1221.861,1333.985 ; 1222.081,1174.942 1222.175,1173.504 cw(c1220.924,1173.725) 1219.673,1173.946 1219.927,1175.384 cw(c1221.178,1175.163) 1222.429,1174.942 ; 1222.115,1324.625 1222.115,1327.127 ; 1222.369,1311.036 1222.369,1313.538 ; 1222.623,1304.178 1222.623,1306.68 ; 1222.623,1317.64 1222.623,1320.142 ; 1222.891,1266.232 1222.985,1264.794 cw(c1221.734,1265.015) 1220.483,1265.236 1220.737,1266.674 cw(c1221.988,1266.453) 1223.239,1266.232 ; 1222.891,1331.262 1220.389,1331.704 1220.831,1334.206 1223.333,1333.764 ; 1223.131,1297.193 1223.131,1299.695 ; 1223.145,1259.374 1223.239,1257.936 cw(c1221.988,1258.157) 1220.737,1258.378 1220.991,1259.816 cw(c1222.242,1259.595) 1223.493,1259.374 ; 1223.145,1324.404 1220.643,1324.846 1221.085,1327.348 1223.587,1326.906